# Altium PCB PCB2.PcbDoc
Units mil, origin at the board's own origin, x right, y up, seen from the top; angles counter-clockwise.
Board outline 2020 x 2355 mil, 2 copper layers (Top Layer, Bottom Layer); 12 components, 68 nets, 93 pads, 0 vias.
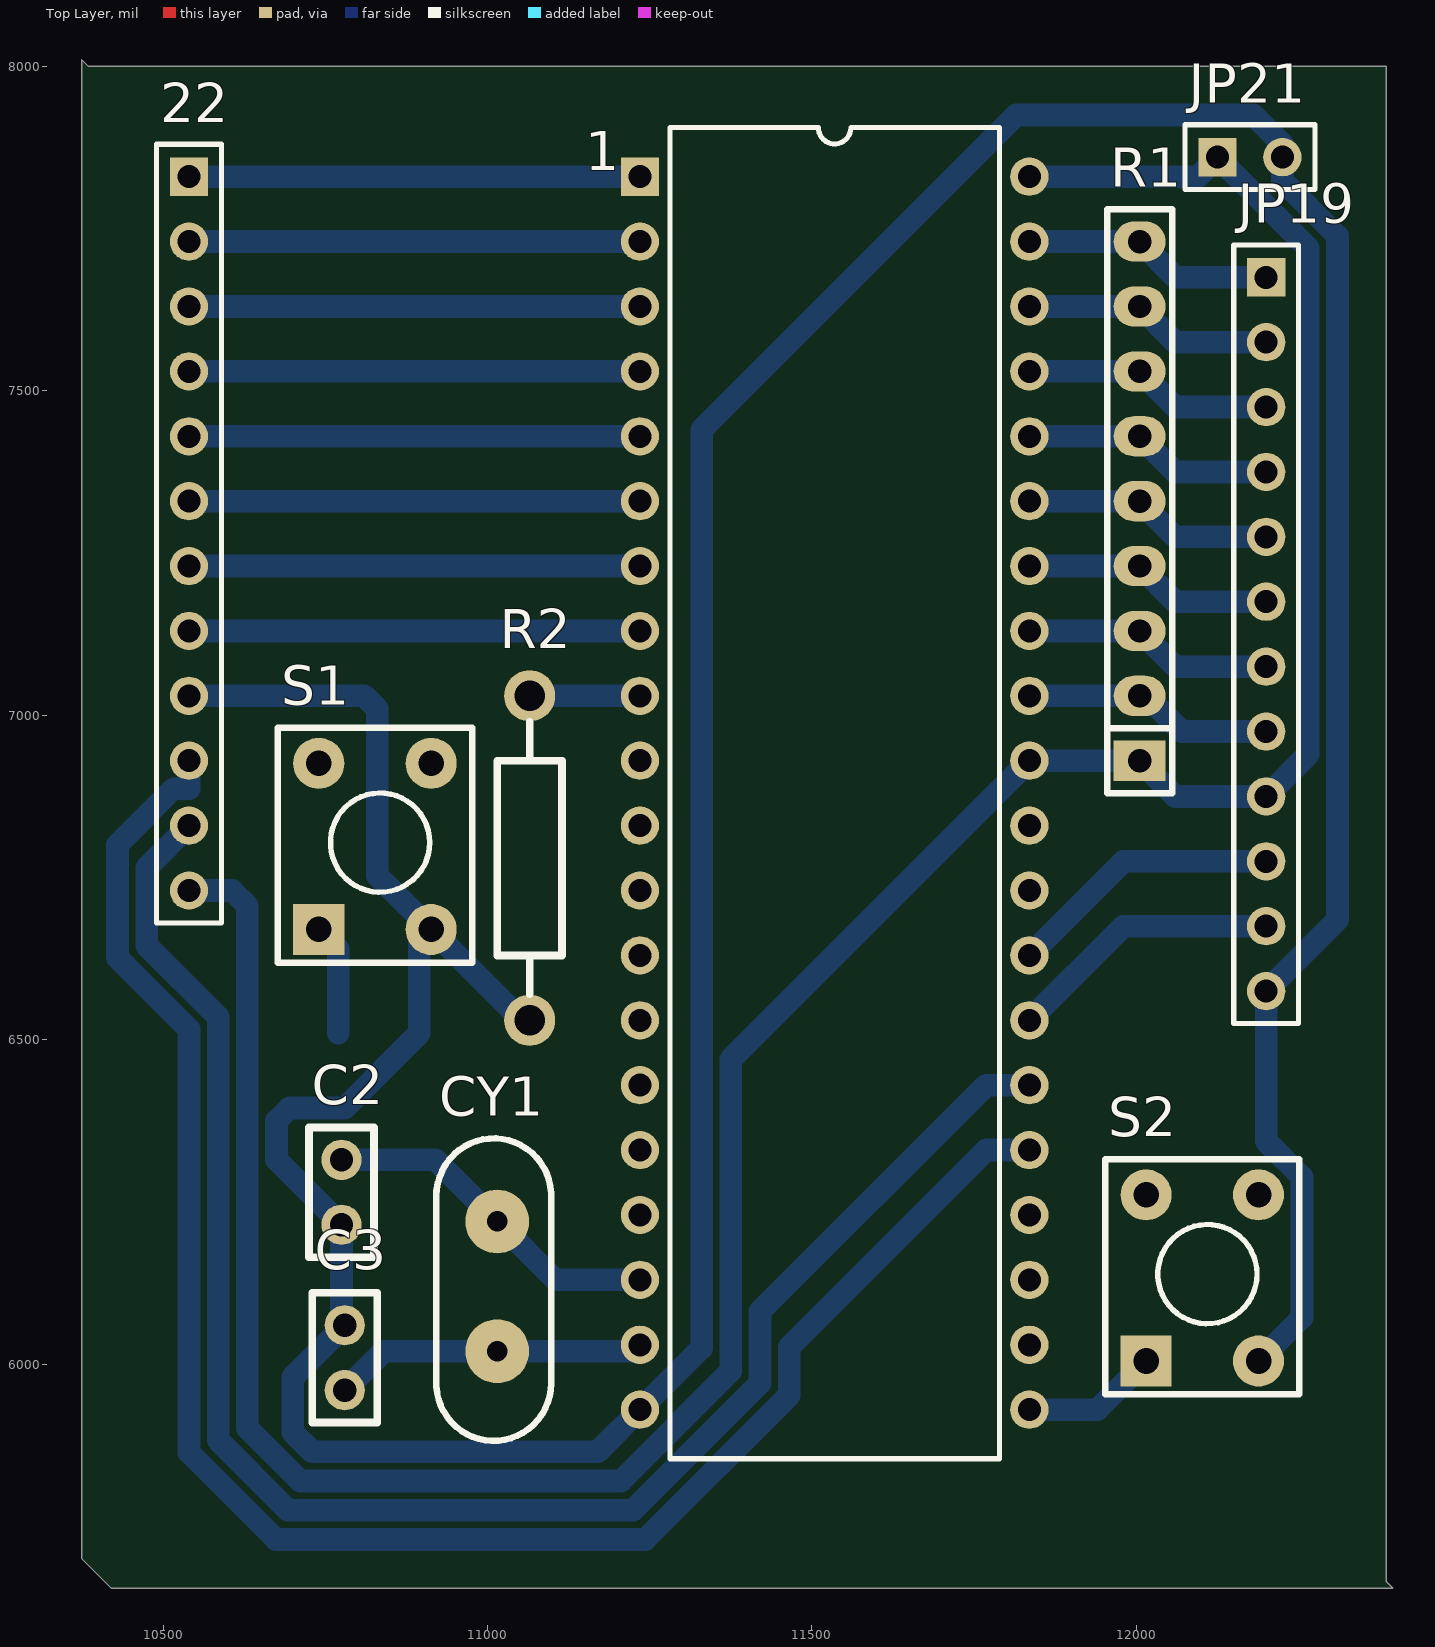
[diagram p0: Top Layer view]
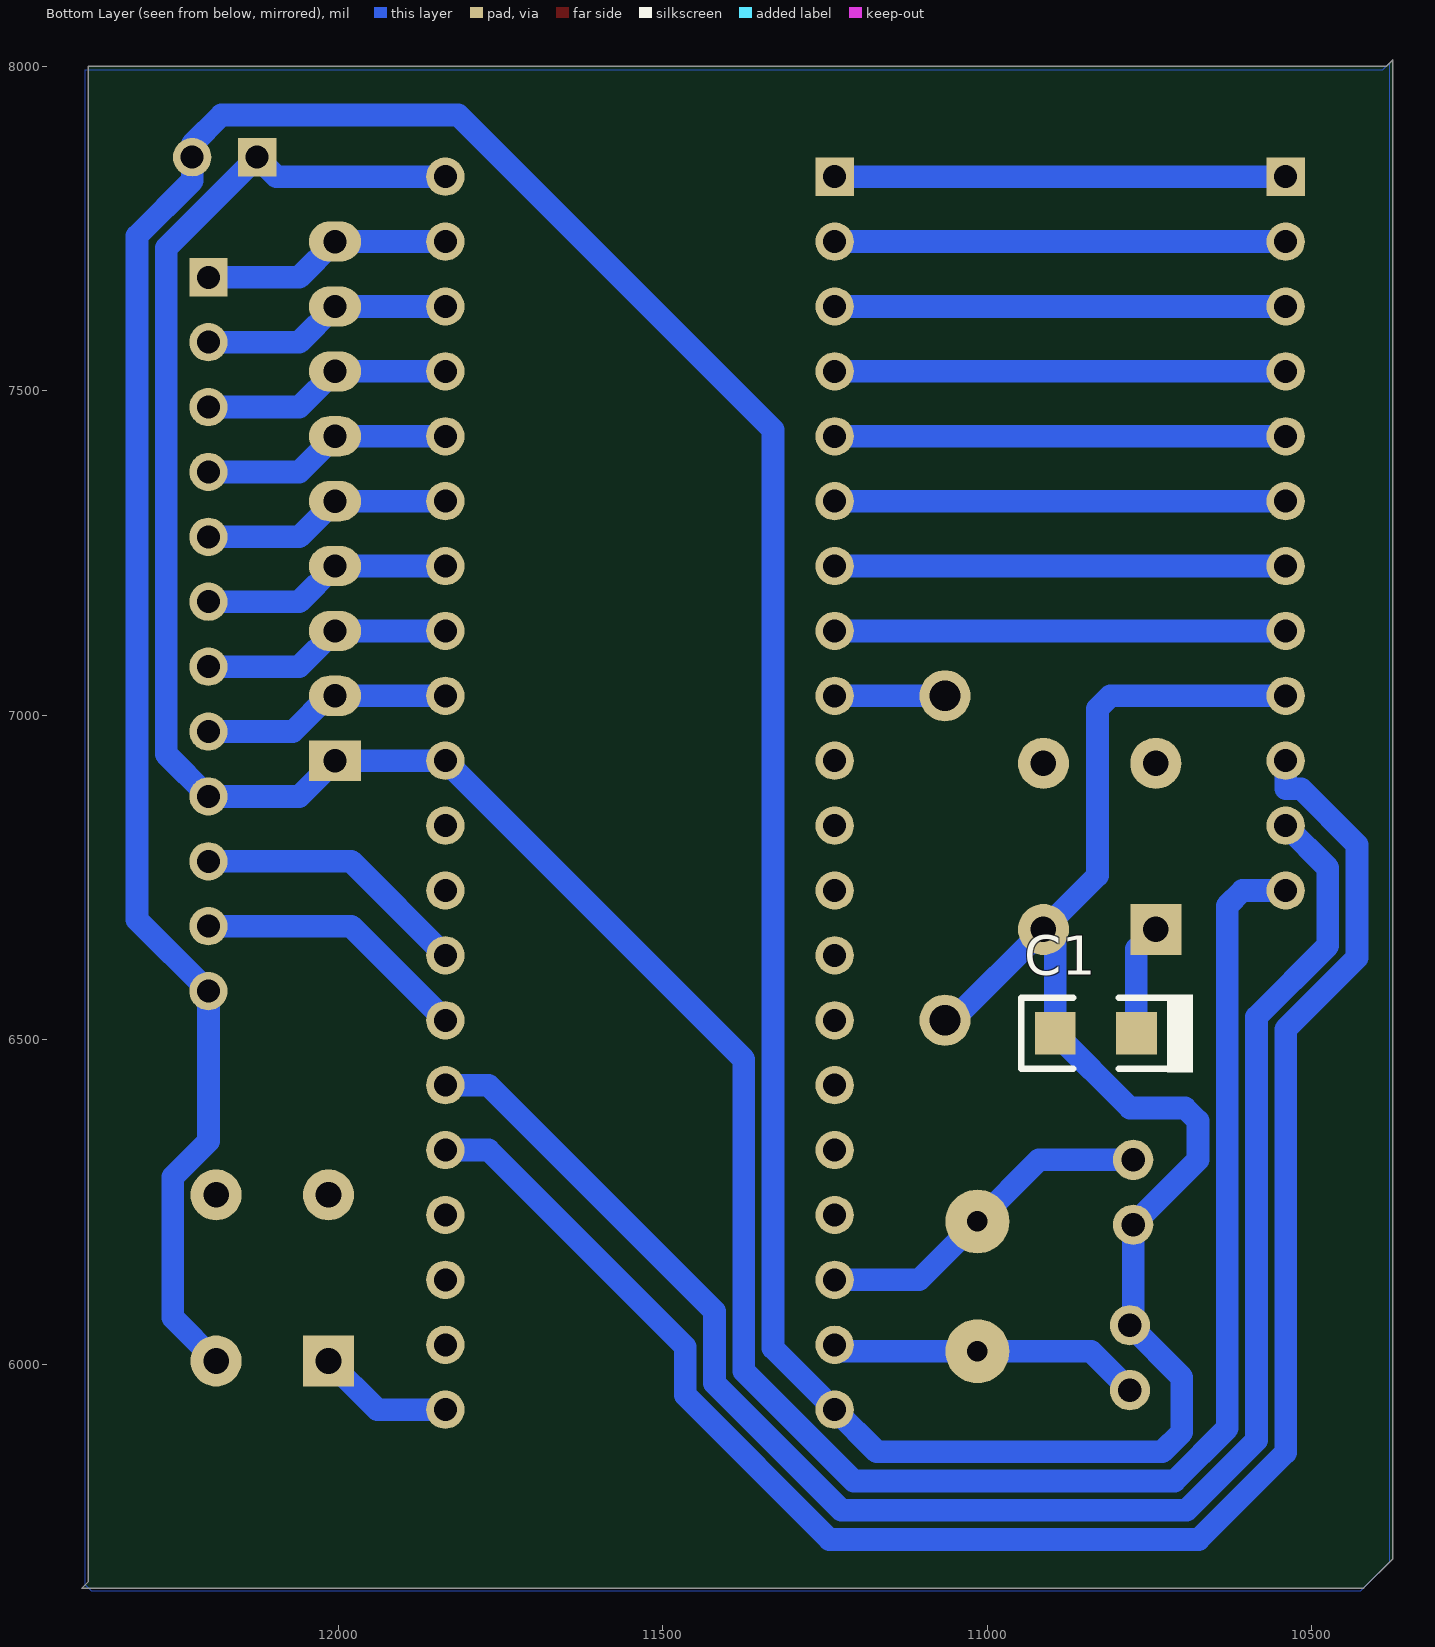
[diagram p1: Bottom Layer view, seen from below]

## Layer stack, top to bottom
Top Solder: solder mask 0.4, Solder Resist, Dk 3.5
Top Layer: signal copper 1.4
Dielectric 1: dielectric 12.6, FR-4, Dk 4.8
Bottom Layer: signal copper 1.4
Bottom Solder: solder mask 0.4, Solder Resist, Dk 3.5

## Board outline
10375,5700 10420,5655 12395,5655 12385,5665 12385,8000 10385,8000 10375,8010

## Design rules (kind name [scope] priority, off if disabled: settings)
Clearance [All] p1: gap=10
PolygonConnect [All] p1: connectstyle=Relief reliefconductorwidth=10 reliefentries=4 polygonreliefangle="90 Angle" airgapwidth=10
RoutingVias [All] p1: holewidth=28 width=50 viastyle="Through Hole" minholewidth=28 minwidth=50 maxholewidth=28 maxwidth=50
SolderMaskExpansion [All] p1: expansion=4
Width [All] p1: maxlimit=50 minlimit=35 preferedwidth=40
30 further rules are at their usual default settings.

## Components (designator, comment, footprint, x,y, rotation, side; value= is the part's Value field where it differs from the comment)
1 "89C52" DIP-40 11535,6880 r270 top
22 "HEADER 12" HDR1X12 10540,7830 r270 top
C1 "10UF" 3216C 10770,6510 r180 bottom
C2 "30pf" RAD0.1 10775,6315 r270 top
C3 "30pf" RAD0.1 10780,5960 r90 top
CY1 "CRY" XTAL-1 11035,6120 r270 top
JP19 "HEADER 12" HDR1X12 12200,7675 r270 top
JP21 "HEADER 2" HDR1X2 12125,7860 r0 top
R1 "排阻" sip9 12005,6930 r90 top
R2 "10K" AXIAL0.5 11065,6530 r90 top
S1 "SW-PB" SWITCH 10740,6670 r90 top
S2 "SW-PB" SWITCH 12015,6005 r90 top

## Footprints (in the part's own frame and the unit in brackets; to place one, negate y for a bottom-side part, rotate by r counter-clockwise, add the part's x,y. Pads: shape width x height; smd on the part's side, far side on the other; paste and mask are expansions set on the pad)
3216C [mm]
  rect 1.6x1.65 smd: 1(0,0) 2(-3.175,0)
  silkscreen extent -4.51,-1.54 2.22,1.52
AXIAL0.5 [mm]
  round 2 hole 1.2: 1(0,0) 2(12.7,0)
  silkscreen extent 1.02,-1.27 11.68,1.27
DIP-40 [mm]
  rect 1.5x1.5 hole 0.9: 1(-24.13,-7.62)
  round 1.5 hole 0.9: 2(-21.59,-7.62) 3(-19.05,-7.62) 4(-16.51,-7.62) 5(-13.97,-7.62) 6(-11.43,-7.62) 7(-8.89,-7.62) 8(-6.35,-7.62) 9(-3.81,-7.62) 10(-1.27,-7.62) 11(1.27,-7.62) 12(3.81,-7.62) 13(6.35,-7.62) 14(8.89,-7.62) 15(11.43,-7.62) 16(13.97,-7.62) 17(16.51,-7.62) 18(19.05,-7.62) 19(21.59,-7.62) 20(24.13,-7.62) 21(24.13,7.62) 22(21.59,7.62) 23(19.05,7.62) 24(16.51,7.62) 25(13.97,7.62) 26(11.43,7.62) 27(8.89,7.62) 28(6.35,7.62) 29(3.81,7.62) 30(1.27,7.62) 31(-1.27,7.62) 32(-3.81,7.62) 33(-6.35,7.62) 34(-8.89,7.62) 35(-11.43,7.62) 36(-13.97,7.62) 37(-16.51,7.62) 38(-19.05,7.62) 39(-21.59,7.62) 40(-24.13,7.62)
  silkscreen extent -26.05,-6.45 26.05,6.45
HDR1X2 [mm] "Connector; Header; 2 Position"
  rect 1.5x1.5 hole 0.9: 1(0,0)
  round 1.5 hole 0.9: 2(2.54,0)
  silkscreen extent -1.27,-1.27 3.81,1.27
HDR1X12 [mm] "Connector; Header; 12 Position"
  rect 1.5x1.5 hole 0.9: 1(0,0)
  round 1.5 hole 0.9: 2(2.54,0) 3(5.08,0) 4(7.62,0) 5(10.16,0) 6(12.7,0) 7(15.24,0) 8(17.78,0) 9(20.32,0) 10(22.86,0) 11(25.4,0) 12(27.94,0)
  silkscreen extent -1.27,-1.27 29.21,1.27
RAD0.1 [mil]
  round 62 hole 36: 1(0,0) 2(100,0)
  silkscreen extent -50,-50 150,50
sip9 [mil]
  rect 62x80 hole 36: 1(0,0)
  oval 62x80 hole 36: 2(100,0) 3(200,0) 4(300,0) 5(400,0) 6(500,0) 7(600,0) 8(700,0) 9(800,0)
  silkscreen extent -50,-50 850,50
SWITCH [mm]
  rect 2x2 hole 1: 1(0,0)
  round 2 hole 1: 2(0,-4.4) 3(6.5,-4.4) 4(6.5,0)
  silkscreen extent -1.3,-6 7.9,1.6
XTAL-1 [mm]
  round 2.5 hole 0.8: 1(-2.54,-0.508) 2(2.54,-0.508)
  silkscreen extent -5.79,-2.89 6.04,1.6

## Part data
22 JP19: "12 Pin Header"
C1: library part CAP-T, "钽电容"
C2 C3: library part CAP1
R2: library part RES

## Nets (pads, with @x,y where several pads share a name; then routed paths per layer and width w, separated by ;. In a path a pad name is that pad's centre, name@x,y a point inside that pad or via, vN(x,y) a via of type N, cw(c..) or ccw(c..) an arc to the next point about the centre after c; other vN are vias at no path point)
A: 
B: 
BL1: 
BL2: 
BL3: 
BL4: 
BL5: 
BL6: 
BL7: 
BL8: 
C: 
D: 
D0: 1.39 JP19.1 R1.9 | length 387.8
  Bottom Layer w35: 1.39 R1.9 12060,7675 JP19.1
D1: 1.38 JP19.2 R1.8 | length 387.8
  Bottom Layer w35: 1.38 R1.8 12060,7575 JP19.2
D2: 1.37 JP19.3 R1.7 | length 387.8
  Bottom Layer w35: 1.37 R1.7 12060,7475 JP19.3
D3: 1.36 JP19.4 R1.6 | length 387.8
  Bottom Layer w35: 1.36 R1.6 12060,7375 JP19.4
D4: 1.35 JP19.5 R1.5 | length 387.8
  Bottom Layer w35: 1.35 R1.5 12060,7275 JP19.5
D5: 1.34 JP19.6 R1.4 | length 387.8
  Bottom Layer w35: 1.34 R1.4 12060,7175 JP19.6
D6: 1.33 JP19.7 R1.3 | length 387.8
  Bottom Layer w35: 1.33 R1.3 12060,7075 JP19.7
D7: 1.32 JP19.8 R1.2 | length 387.8
  Bottom Layer w35: 1.32 R1.2 12014.89,7030 12069.89,6975 JP19.8
DU: 1.27 JP19.11 | length 425.1
  Bottom Layer w35: 1.27 11980,6675 JP19.11
E: 
EA: 1.31 1.40 22.12 JP19.9 JP21.1 R1.1 | length 4645
  Bottom Layer w35: 22.12 10606.51,6730 10630,6706.51 10630,5901.36 10711.36,5820 11205.65,5820 11375,5989.35 11375,6470 1.31 R1.1 12060,6875 JP19.9 12265,6940 12265,7720 JP21.1 12095,7830 1.40
F: 
G: 
GND: 1.20 22.9 C1.2 C2.2 C3.2 JP19.12 JP21.2 R2.1 S1.2 S2.2 | length 7127.1
  Bottom Layer w35: 22.9 10810,7030 10830,7010 10830,6753.23 S1.2 ; R2.1 11053.23,6530 S1.2 ; S2.2 12255.1,6071.87 12255.1,6288.6 12200,6343.7 JP19.12 12310,6685 12310,7738.64 12225,7823.64 JP21.2 12225,7880 12180,7925 11815,7925 11330,7440 11330,6025 1.20 11170,5865 10730,5865 10700,5895 10700,5980 C3.2 10775,6065 C2.2 10675,6315 10675,6375 10695,6395 10780,6395 C1.2 10895,6651.77 S1.2
H: 
NBL6: 
Net1_21: 1.21 S2.1 | length 211.1
  Bottom Layer w35: 1.21 11940,5930 S2.1
NetC1_1: C1.1 S1.1 | length 172.4
  Bottom Layer w35: S1.1 10770,6640 C1.1
NetR3_2: 
NetR3_3: 
NetR3_4: 
NetR3_5: 
NetR3_6: 
NetR3_7: 
NetR3_8: 
NetR3_9: 
P10: 1.1 22.1 | length 695
  Bottom Layer w35: 22.1 1.1
P11: 1.2 22.2 | length 695
  Bottom Layer w35: 22.2 1.2
P12: 1.3 22.3 | length 695
  Bottom Layer w35: 22.3 1.3
P13: 1.4 22.4 | length 695
  Bottom Layer w35: 22.4 1.4
P14: 1.5 22.5 | length 695
  Bottom Layer w35: 22.5 1.5
P15: 1.6 22.6 | length 695
  Bottom Layer w35: 22.6 1.6
P16: 1.7 22.7 | length 695
  Bottom Layer w35: 22.7 1.7
P17: 1.8 22.8 | length 695
  Bottom Layer w35: 22.8 1.8
RE1: 
RE2: 
RE3: 
RE4: 
RE5: 
RE6: 
RE7: 
RE8: 
RST: 1.9 R2.2 | length 170
  Bottom Layer w35: R2.2 1.9
WE: 1.28 JP19.10 | length 425.1
  Bottom Layer w35: 1.28 11980,6775 JP19.10
WE1: 
WE2: 
WE3: 
WE4: 
WE5: 
WE6: 
WE7: 
WE8: 
WEBF: 1.25 22.10 | length 2813.6
  Bottom Layer w35: 22.10 10540,6887.03 10516.38,6887.03 10430,6800.65 10430,6626.36 10540,6516.36 10540,5864.08 10674.08,5730 11242.93,5730 11465,5952.07 11465,6026.51 11768.49,6330 1.25
WELR: 1.26 22.11 | length 2650.6
  Bottom Layer w35: 22.11 10475,6765 10475,6645 10585,6535 10585,5882.72 10692.72,5775 11224.29,5775 11420,5970.71 11420,6081.51 11768.49,6430 1.26
XTAL1: 1.19 C3.1 CY1.2 | length 484
  Bottom Layer w35: C3.1 10840,6020 CY1.2 11225,6020 1.19
XTAL2: 1.18 C2.1 CY1.1 | length 536.6
  Bottom Layer w35: C2.1 10920,6315 CY1.1 11105,6130 1.18
pads on no net: 1.10 1.11 1.12 1.13 1.14 1.15 1.16 1.17 1.22 1.23 1.24 1.29 1.30 S1.3 S1.4 S2.3 S2.4

## Polygon pours and split planes (outlines as drawn)
no net on Bottom Layer "Top Layer-No Net" (solid, remove dead copper, pour order 2): 10380,8005 10380,5695 10425,5650 12380,5650 12390,5660 12390,7995 10390,7995 10385,8000